# EAGLE board TrackIt_Panel_V01 (EAGLE 9.0.0)
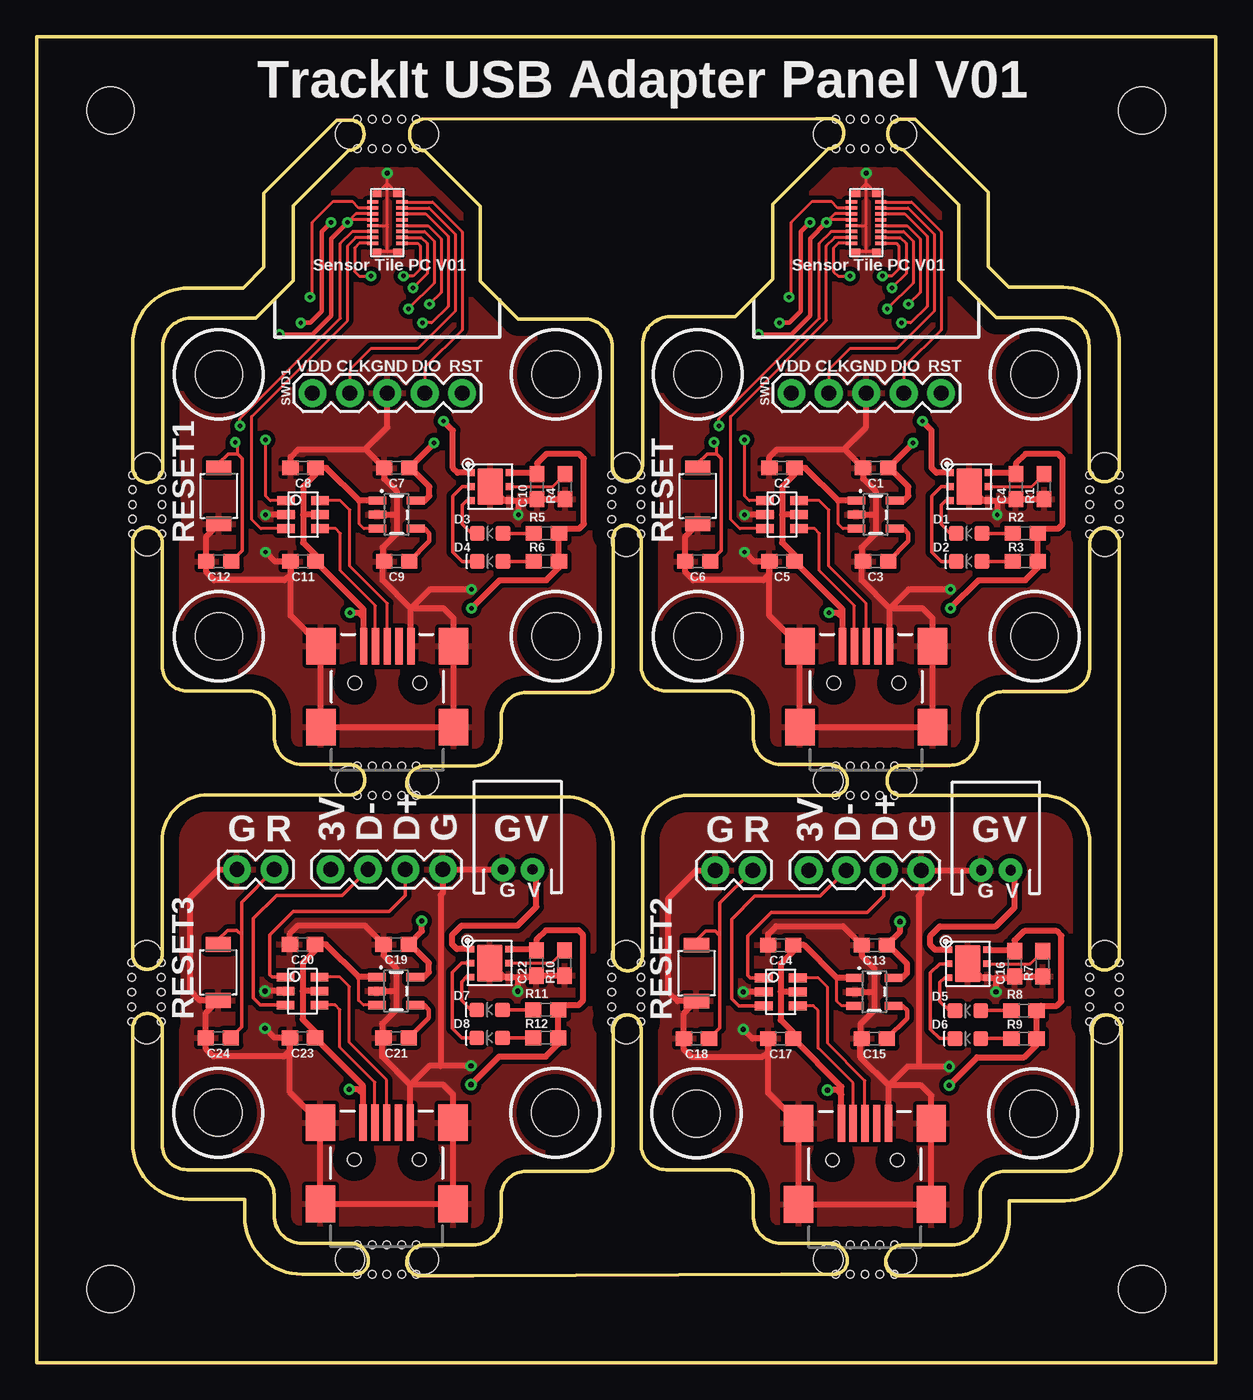
[diagram p0: board, top side]
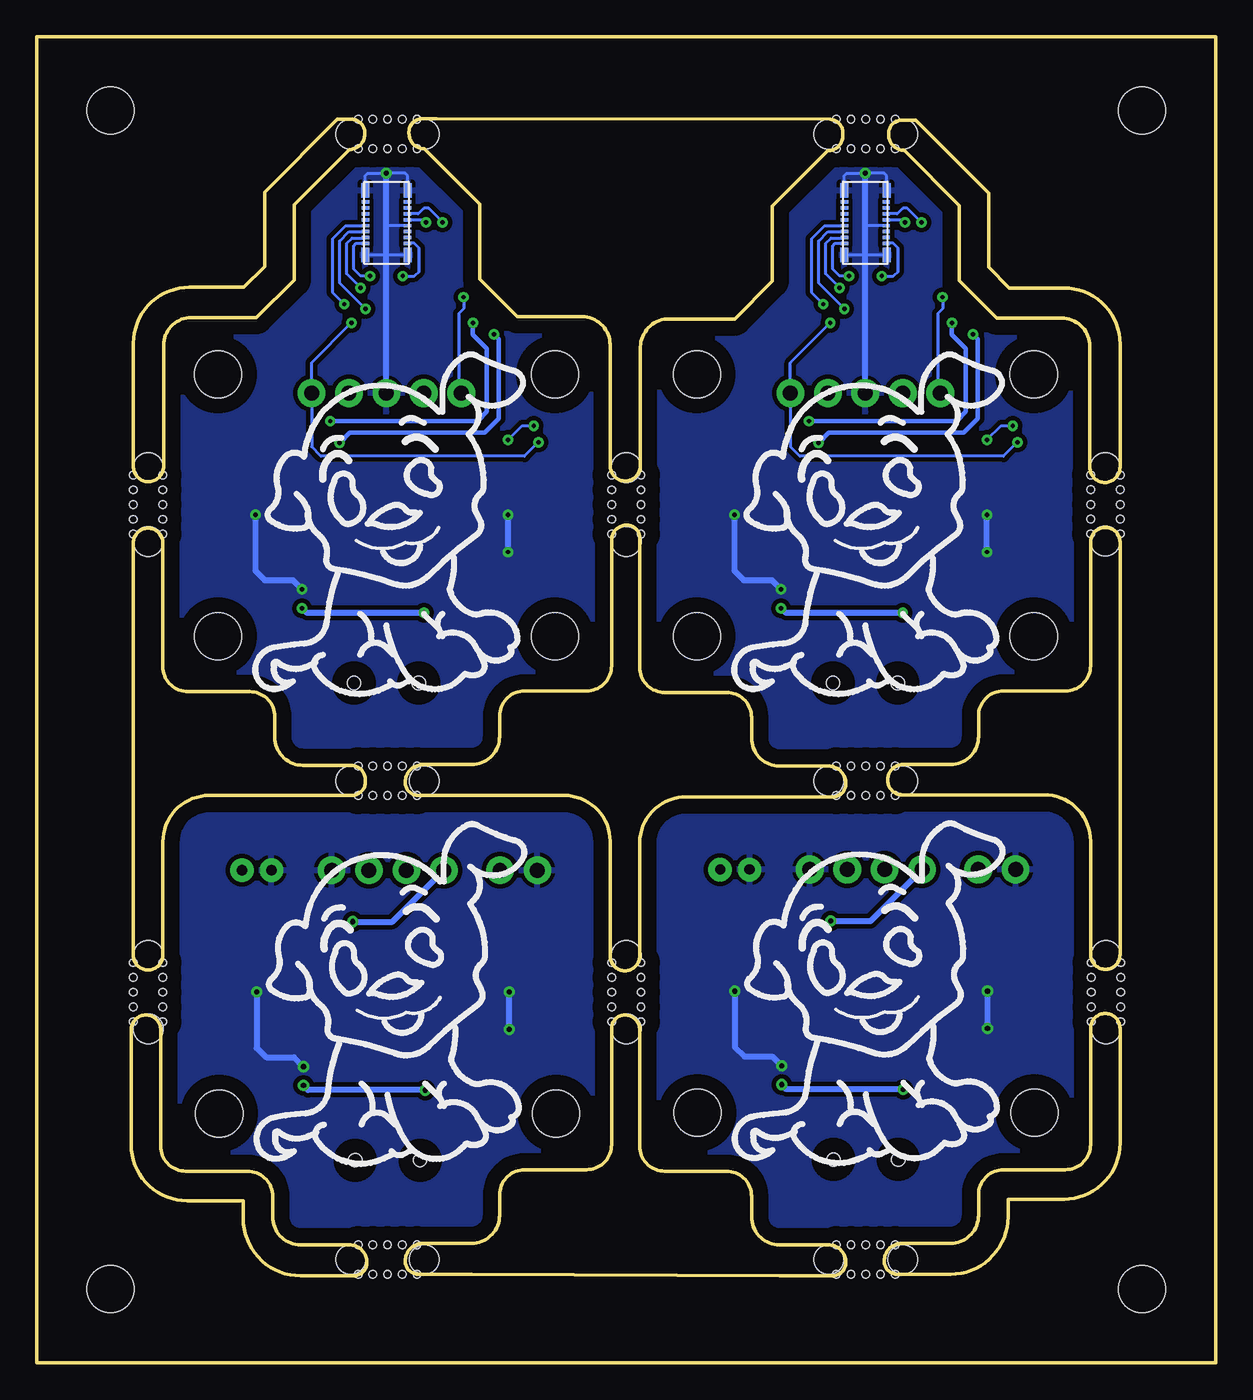
[diagram p1: board, bottom side, seen from below]

Size 80 x 90 mm. Coordinates in mm from the lower left corner, seen from the top.
Outline: 21.25,40.6 18,40.6 arc-90 16.1,42.5 16.1,43.9 arc90 14.4,45.6 10.2,45.6 arc-90 8.5,47.3 8.5,55.7 arc90 7.5,56.7 arc90 6.5,55.7 6.5,27.7 arc90 7.5,26.7 arc90 8.5,27.7 8.5,35.4 arc-90 11.65,38.55 21.3,38.55 arc90 22.25,39.5 22.25,39.6 arc90 21.25,40.6
Outline: 21.25,40.6 21.3,40.6
Outline: 31.5,42.4 31.5,43.8 arc-90 33.2,45.5 37.4,45.5 arc90 39.1,47.2 39.1,55.85 arc-90 39.85,56.85 arc-90 41,55.95 41,47.3 arc90 42.7,45.6 46.9,45.6 arc-90 48.6,43.9 48.6,42.5 arc90 50.5,40.6 53.8,40.6 arc-90 55,39.4 arc-96 54,38.5 44.2,38.5 arc90 41.1,35.4 41.1,27.6 arc-90 40.1,26.6 arc-90 39.1,27.6 39.1,35.3 arc90 35.9,38.4 26.1,38.4
Outline: 31.5,42.4 arc-90 29.6,40.5
Outline: 29.6,40.5 26.3,40.5
Outline: 26.3,40.5 arc90 25.1,39.3
Outline: 25.1,39.3 arc96 26.1,38.4
Outline: 31.5,42.4 arc-90 29.6,40.5
Outline: 26.3,40.5 arc90 25.1,39.3
Outline: 25.1,39.3 arc96 26.1,38.4
Outline: 58.7,40.55 61.95,40.55 arc90 63.85,42.45 63.85,43.85 arc-90 65.55,45.55 69.75,45.55 arc90 71.45,47.25 71.45,55.65 arc-90 72.45,56.65 arc-90 73.45,55.65 73.45,27.65 arc-90 72.45,26.65 arc-90 71.45,27.65 71.45,35.35 arc90 68.3,38.5 58.65,38.5 arc-90 57.7,39.45 57.7,39.55 arc-90 58.7,40.55
Outline: 58.7,40.55 58.65,40.55
Outline: 0,0 80,0 80,90 0,90 0,0
Outline: 6.5,14.9 6.5,22.7 arc-90 7.5,23.7 arc-90 8.5,22.7 8.5,14.8 arc90 10.2,13.1 14.4,13.1 arc-90 16.1,11.4 16.1,10 arc90 18,8.1 21.3,8.1 arc-90 22.5,6.9 arc-96 21.5,6 18,6 arc-90 14.1,9.9 14.1,11.1 10.3,11.1 arc-90 6.5,14.9
Outline: 39.1,22.6 39.1,14.7 arc-90 37.4,13 33.2,13 arc90 31.5,11.3 31.5,9.9 arc-90 29.6,8 26.3,8 arc90 25.1,6.8 arc96 26.1,5.9 29.6,5.9 50.5,6 54,6 arc96 55,6.9 arc90 53.8,8.1 50.5,8.1 arc-90 48.6,10 48.6,11.4 arc90 46.9,13.1 42.7,13.1 arc-90 41,14.8 41,22.7 arc90 40.1,23.6 arc90 39.1,22.6
Outline: 73.6,14.8 73.6,22.6 arc90 72.6,23.6 arc90 71.6,22.6 71.6,14.7 arc-90 69.9,13 65.7,13 arc90 64,11.3 64,9.9 arc-90 62.1,8 58.8,8 arc90 57.6,6.8 arc96 58.6,5.9 62.1,5.9 arc90 66,9.8 66,11 69.8,11 arc90 73.6,14.8
Outline: 6.5,60.8 arc90 7.5,59.75 arc90 8.55,60.8 8.55,69 arc-90 10.45,70.9 14.85,70.9 17.4,73.45 17.4,78.55 21.15,82.3 arc90 22.2,83.35 22.2,83.45 arc90 21.3,84.35 20.35,84.35 15.4,79.4 15.4,74.35 14,72.95 10.3,72.95 arc90 6.5,69.15 6.5,60.8
Outline: 73.45,60.85 arc-90 72.45,59.8 arc-90 71.4,60.85 71.4,69.05 arc90 69.5,70.95 65.1,70.95 62.55,73.5 62.55,78.6 58.8,82.35 arc-90 57.75,83.4 57.75,83.5 arc-90 58.65,84.4 59.6,84.4 64.55,79.45 64.55,74.4 65.95,73 69.65,73 arc-90 73.45,69.2 73.45,60.85
Outline: 39.05,60.9 arc90 40.05,59.85 arc90 41.1,60.9 41.1,69.1 arc-90 43,71 47.4,71 49.95,73.55 49.95,78.65 53.7,82.4 arc90 54.75,83.45 54.75,83.55 arc90 53.85,84.45 52.9,84.45 26.15,84.4 arc90 25.3,83.4 25.3,83.3 arc90 26.35,82.25 30.1,78.5 30.1,73.4 32.65,70.85 37.05,70.85 arc-90 39.05,68.95 39.05,60.9
Copper layers (1*16): Top 0.035mm / dielectric 1.5mm / Bottom 0.035mm
Design rules "default *": minimum track width 6mil, minimum drill 0.35mm, track to track 6mil, track to pad 6mil, pad to pad 6mil, via to via 6mil, smd to smd 6mil, copper to edge 40mil, drill to drill 6mil, minimum pad ring 10mil, minimum via ring 8mil, stop-mask expansion 4mil, vias tented up to drill 20mil, thermal gap 10mil
Holes 0.5 mm at 8.45,23.15 8.45,24.15 8.45,25.15 8.45,26.15 8.45,27.15 6.45,23.15 6.45,24.15 6.45,25.15 6.45,26.15 6.45,27.15 8.49,56.26 8.49,57.26 8.49,58.26 8.49,59.26 8.49,60.26 6.49,56.26 6.49,57.26 6.49,58.26 6.49,59.26 6.49,60.26 21.75,6 22.75,6 23.75,6 24.75,6 25.75,6 21.75,8 22.75,8 23.75,8 24.75,8 25.75,8 54.2,6 55.2,6 56.2,6 57.2,6 58.2,6 54.2,8 55.2,8 56.2,8 57.2,8 58.2,8 54.2,38.5 55.2,38.5 56.2,38.5 57.2,38.5 58.2,38.5 54.2,40.5 55.2,40.5 56.2,40.5 57.2,40.5 58.2,40.5 21.75,38.5 22.75,38.5 23.75,38.5 24.75,38.5 25.75,38.5 21.75,40.5 22.75,40.5 23.75,40.5 24.75,40.5 25.75,40.5 21.75,82.4 22.75,82.4 23.75,82.4 24.75,82.4 25.75,82.4 21.75,84.4 22.75,84.4 23.75,84.4 24.75,84.4 25.75,84.4 54.2,82.4 55.2,82.4 56.2,82.4 57.2,82.4 58.2,82.4 54.2,84.4 55.2,84.4 56.2,84.4 57.2,84.4 58.2,84.4 41,56.25 41,57.25 41,58.25 41,59.25 41,60.25 39,56.25 39,57.25 39,58.25 39,59.25 39,60.25 73.45,23.15 73.45,24.15 73.45,25.15 73.45,26.15 73.45,27.15 71.45,23.15 71.45,24.15 71.45,25.15 71.45,26.15 71.45,27.15 73.45,56.25 73.45,57.25 73.45,58.25 73.45,59.25 73.45,60.25 71.45,56.25 71.45,57.25 71.45,58.25 71.45,59.25 71.45,60.25 41,23.15 41,24.15 41,25.15 41,26.15 41,27.15 39,23.15 39,24.15 39,25.15 39,26.15 39,27.15
Holes 2 mm at 7.45,22.65 7.45,27.65 7.49,55.76 7.49,60.76 21.25,7 26.25,7 53.7,7 58.7,7 53.7,39.5 58.7,39.5 21.25,39.5 26.25,39.5 21.25,83.4 26.25,83.4 53.7,83.4 58.7,83.4 40,55.75 40,60.75 72.45,22.65 72.45,27.65 72.45,55.75 72.45,60.75 40,22.65 40,27.65
Holes 3.2 mm at 5,5 75,5 75,85 5,85 67.71,49.31 44.85,49.31 44.85,67.09 67.71,67.09 35.21,49.31 12.35,49.31 12.35,67.09 35.21,67.09 67.62,16.92 44.76,16.92 35.17,16.97 12.31,16.97

## Footprints (pad centres in the part's own frame; a part is rotated, then mirrored left to right if it is on the bottom)
BM10B(0.8)_BM10NB(0.8)-16DS-0.4V(51) = smd 0.55 x 1: G$1 1.445,3.59; G$2 -1.445,3.59; G$3 1.445,-0.79; G$4 -1.445,-0.79 | smd 0.5 x 0.23: GND$1 1.42,1.2; GPIO2 -1.42,1.2; GPIO3 -1.42,1.6; GPIO5 -1.42,2.4; GPIO6 -1.42,2.8; MIC_CLK 1.42,2.8; NRST -1.42,2; RXD 1.42,0.8; SPI_MISO -1.42,0; SPI_MOSI -1.42,0.4; SPI_NSS -1.42,0.8; SPI_SCK 1.42,0; TXD 1.42,0.4; VDD_1.8V 1.42,2.4; VIN_2-5V 1.42,2; VUSB_3.3V 1.42,1.6
0603 = smd 1.1 x 1: 1 -0.85,0; 2 0.85,0
LED-0603 = smd 1 x 1: A -0.877,0; C 0.877,0
USB-MINIB = smd 2.5 x 0.5: D+ 2.5,0; D- 2.5,0.8; GND 2.5,-1.6; ID 2.5,-0.8; VBUS 2.5,1.6 | smd 2.5 x 2: S1 -3,4.5; S2 2.5,4.5; S3 -3,-4.5; S4 2.5,-4.5 | hole 0.9: 0,2.2; 0,-2.2
1X04 = drill 1.016 pad 1.88: 1 0,0; 2 2.54,0; 3 5.08,0; 4 7.62,0
JST-2-PTH = drill 0.7 pad 1.6: 1 -1,0; 2 1,0
1X02 = drill 1.016 pad 1.88: 1 0,0; 2 2.54,0
SW2-2.6-3.0X2.5X1.2+0.4MM = smd 1 x 1.7: 1 -1.9,0; 2 1.9,0
BM10B(0.8)_BM10B(0.8)-16DP-0.4V(51) = smd 0.6 x 0.44: G$1 0.7,3.37; G$2 -0.7,3.37; G$3 0.7,-0.57; G$4 -0.7,-0.57 | smd 0.75 x 0.23: GND$1 -1,1.2; GPIO2 1,1.2; GPIO3 1,1.6; GPIO5 1,2.4; GPIO6 1,2.8; MIC_CLK -1,2.8; NRST 1,2; RXD -1,0.8; SPI_MISO 1,0; SPI_MOSI 1,0.4; SPI_NSS 1,0.8; SPI_SCK -1,0; TXD -1,0.4; VDD_1.8V -1,2.4; VIN_2-5V -1,2; VUSB_3.3V -1,1.6
1X05 = drill 1.016 pad 1.88: 1 0,0; 2 2.54,0; 3 5.08,0; 4 7.62,0; 5 10.16,0
SOT23-5 = smd 0.55 x 1.2: 3V3&5 -0.95,1.3; BYP$4 0.95,1.3; EN$3 0.95,-1.3; GND$2 0,-1.3; VIN$1 -0.95,-1.3
6-DFN(3X3) = smd 0.45 x 0.5: BAT$1 -0.95,-1.3; CHRG$3 0.95,-1.3; GND$4 0.95,1.3; ON$2 0,-1.3; PROG$5 0,1.3; VCC$6 -0.95,1.3 | smd 2.5 x 1.75: PAD_GND$7 0,0
SOT23-6L = smd 0.6 x 1.2: D+IN$1 -0.95,-1.15; D+OUT$1$6 -0.95,1.15; D-IN$3 0.95,-1.15; D-OUT$1$4 0.95,1.15; GND$2 0,-1.15; VUSB$5 0,1.15

## Placement (x,y rotation side)
ADAPTER_BOARD  BM10B(0.8)_BM10NB(0.8)-16DS-0.4V(51)  [BM10B(0.8)_BM10NB(0.8)-16DS-0.4V(51)]  56.28,75.98 0 bottom
ADAPTER_BOARD1  BM10B(0.8)_BM10NB(0.8)-16DS-0.4V(51)  [BM10B(0.8)_BM10NB(0.8)-16DS-0.4V(51)]  23.78,75.98 0 bottom
C1  1.0uF  [0603]  56.91,60.74 180 top
C2  1.0uF  [0603]  50.56,60.74 180 top
C3  10nF  [0603]  56.91,54.39 180 top
C4  1.0uF  [0603]  66.44,59.47 270 top
C5  0.1uF  [0603]  50.56,54.39 180 top
C6  0.1uF  [0603]  44.85,54.39 180 top
C7  1.0uF  [0603]  24.41,60.74 180 top
C8  1.0uF  [0603]  18.07,60.74 180 top
C9  10nF  [0603]  24.41,54.39 180 top
C10  1.0uF  [0603]  33.94,59.47 270 top
C11  0.1uF  [0603]  18.07,54.39 180 top
C12  0.1uF  [0603]  12.35,54.39 180 top
C13  1.0uF  [0603]  56.83,28.35 180 top
C14  1.0uF  [0603]  50.48,28.35 180 top
C15  10nF  [0603]  56.83,22 180 top
C16  1.0uF  [0603]  66.35,27.08 270 top
C17  0.1uF  [0603]  50.48,22 180 top
C18  0.1uF  [0603]  44.76,22 180 top
C19  1.0uF  [0603]  24.38,28.4 180 top
C20  1.0uF  [0603]  18.03,28.4 180 top
C21  10nF  [0603]  24.38,22.05 180 top
C22  1.0uF  [0603]  33.9,27.13 270 top
C23  0.1uF  [0603]  18.03,22.05 180 top
C24  0.1uF  [0603]  12.31,22.05 180 top
D1  BLUE  [LED-0603]  63.27,56.3 180 top
D2  GREEN  [LED-0603]  63.27,54.39 180 top
D3  BLUE  [LED-0603]  30.77,56.3 180 top
D4  GREEN  [LED-0603]  30.77,54.39 180 top
D5  BLUE  [LED-0603]  63.18,23.9 180 top
D6  GREEN  [LED-0603]  63.18,22 180 top
D7  BLUE  [LED-0603]  30.73,23.95 180 top
D8  GREEN  [LED-0603]  30.73,22.05 180 top
J1  USB_MINI-B_SMT  [USB-MINIB]  56.28,46.13 90 top
J2  USB_MINI-B_SMT  [USB-MINIB]  23.78,46.13 90 top
J3  USB_MINI-B_SMT  [USB-MINIB]  56.19,13.74 90 top
J4  USB  [1X04]  60,33.43 180 top
J5  Bat  [JST-2-PTH]  65.08,33.43 0 top
J6  Reset  [1X02]  46.03,33.43 0 top
J7  USB_MINI-B_SMT  [USB-MINIB]  23.74,13.79 90 top
J8  USB  [1X04]  27.55,33.48 180 top
J9  Bat  [JST-2-PTH]  32.63,33.48 0 top
J10  Reset  [1X02]  13.58,33.48 0 top
R1  47k  [0603]  68.34,59.47 90 top
R2  1k  [0603]  67.08,56.3 0 top
R3  1k  [0603]  67.08,54.39 0 top
R4  47k  [0603]  35.84,59.47 90 top
R5  1k  [0603]  34.58,56.3 0 top
R6  1k  [0603]  34.58,54.39 0 top
R7  47k  [0603]  68.26,27.08 90 top
R8  1k  [0603]  66.99,23.9 0 top
R9  1k  [0603]  66.99,22 0 top
R10  47k  [0603]  35.81,27.13 90 top
R11  1k  [0603]  34.54,23.95 0 top
R12  1k  [0603]  34.54,22.05 0 top
RESET  B3U-3000PM  [SW2-2.6-3.0X2.5X1.2+0.4MM]  44.85,58.84 90 top
RESET1  B3U-3000PM  [SW2-2.6-3.0X2.5X1.2+0.4MM]  12.35,58.84 90 top
RESET2  B3U-3000PM  [SW2-2.6-3.0X2.5X1.2+0.4MM]  44.76,26.44 90 top
RESET3  B3U-3000PM  [SW2-2.6-3.0X2.5X1.2+0.4MM]  12.31,26.49 90 top
SENSOR_TILE  BM10B(0.8)_BM10B(0.8)-16DP-0.4V(51)  [BM10B(0.8)_BM10B(0.8)-16DP-0.4V(51)]  56.28,75.98 0 top
SENSOR_TILE1  BM10B(0.8)_BM10B(0.8)-16DP-0.4V(51)  [BM10B(0.8)_BM10B(0.8)-16DP-0.4V(51)]  23.78,75.98 0 top
SWD  [1X05]  51.2,65.82 0 top
SWD1  [1X05]  18.7,65.82 0 top
U$1  LDK120M33R  [SOT23-5]  24.41,57.56 270 top
U$2  STBC08PMR  [6-DFN(3X3)]  30.77,59.47 270 top
U$3  LDK120M33R  [SOT23-5]  56.91,57.56 270 top
U$4  STBC08PMR  [6-DFN(3X3)]  63.27,59.47 270 top
U$5  USBLC6  [SOT23-6L]  50.56,57.56 270 top
U$6  USBLC6  [SOT23-6L]  18.07,57.56 270 top
U$7  LDK120M33R  [SOT23-5]  56.83,25.17 270 top
U$8  STBC08PMR  [6-DFN(3X3)]  63.18,27.08 270 top
U$9  USBLC6  [SOT23-6L]  50.48,25.17 270 top
U$10  LDK120M33R  [SOT23-5]  24.38,25.22 270 top
U$11  STBC08PMR  [6-DFN(3X3)]  30.73,27.13 270 top
U$12  USBLC6  [SOT23-6L]  18.03,25.22 270 top

## Library data of the parts
ADAPTER_BOARD ADAPTER_BOARD1 SENSOR_TILE SENSOR_TILE1 = BM10B(0.8)
C1 C2 C4 C7 C8 C10 C13 C14 C16 C19 C20 C22 = SparkFun-Capacitors; PROD_ID: CAP-00868
C3 C9 C15 C21 = SparkFun-Capacitors; PROD_ID: CAP-00867
C5 C6 C11 C12 C17 C18 C23 C24 = SparkFun-Capacitors; PROD_ID: CAP-08604
D1 D3 D5 D7 = SparkFun-LED; PROD_ID: DIO-08575
D2 D4 D6 D8 = SparkFun-LED; PROD_ID: DIO-00821
J1-J3 J7 = SparkFun-Connectors; PROD_ID: CONN-08193; SF_ID: PRT-00587
J4 J8 = SparkFun-Connectors; PROD_ID: CONN-09696
J5 J9 = SparkFun-Connectors; PROD_ID: CONN-09863; SKU: PRT-09914
J6 J10 SWD SWD1 = SparkFun-Connectors
R1 R4 R7 R10 = SparkFun-Resistors; PROD_ID: RES-07871
R2 R3 R5 R6 R8 R9 R11 R12 = SparkFun-Resistors; PROD_ID: RES-07856
RESET RESET1-RESET3 = Seeed-Switch-2016; MPN: B3U-1000P-2P-SMD
U$1 U$3 U$7 U$10 = LDK120M33R
U$2 U$4 U$8 U$11 = STBC08PMR
U$5 U$6 U$9 U$12 = USBLC6-2SC6

## Nets
3.3V: ADAPTER_BOARD.VUSB_3.3V C1.1 SENSOR_TILE.VIN_2-5V SENSOR_TILE.VUSB_3.3V U$3.3V3&5
3.3V1: ADAPTER_BOARD1.VUSB_3.3V C7.1 SENSOR_TILE1.VIN_2-5V SENSOR_TILE1.VUSB_3.3V U$1.3V3&5
3.3V2: C13.1 J4.4 U$7.3V3&5
3.3V3: C19.1 J8.4 U$10.3V3&5
GND: ADAPTER_BOARD.G$1 ADAPTER_BOARD.G$2 ADAPTER_BOARD.G$3 ADAPTER_BOARD.G$4 ADAPTER_BOARD.GND$1 C1.2 C2.2 C3.2 C4.2 C5.2 C6.2 J1.GND J1.S1 J1.S2 J1.S3 J1.S4 R1.1 RESET.1 SENSOR_TILE.G$1 SENSOR_TILE.G$2 SENSOR_TILE.G$3 SENSOR_TILE.G$4 SENSOR_TILE.GND$1 SWD.3 U$3.GND$2 U$4.GND$4 U$4.PAD_GND$7 U$5.GND$2
GND1: ADAPTER_BOARD1.G$1 ADAPTER_BOARD1.G$2 ADAPTER_BOARD1.G$3 ADAPTER_BOARD1.G$4 ADAPTER_BOARD1.GND$1 C7.2 C8.2 C9.2 C10.2 C11.2 C12.2 J2.GND J2.S1 J2.S2 J2.S3 J2.S4 R4.1 RESET1.1 SENSOR_TILE1.G$1 SENSOR_TILE1.G$2 SENSOR_TILE1.G$3 SENSOR_TILE1.G$4 SENSOR_TILE1.GND$1 SWD1.3 U$1.GND$2 U$2.GND$4 U$2.PAD_GND$7 U$6.GND$2
GND2: C13.2 C14.2 C15.2 C16.2 C17.2 C18.2 J3.GND J3.S1 J3.S2 J3.S3 J3.S4 J4.1 J5.1 J6.1 R7.1 RESET2.1 U$7.GND$2 U$8.GND$4 U$8.PAD_GND$7 U$9.GND$2
GND3: C19.2 C20.2 C21.2 C22.2 C23.2 C24.2 J7.GND J7.S1 J7.S2 J7.S3 J7.S4 J8.1 J9.1 J10.1 R10.1 RESET3.1 U$10.GND$2 U$11.GND$4 U$11.PAD_GND$7 U$12.GND$2
N$1: R1.2 U$4.PROG$5
N$2: J1.D+ U$5.D+OUT$1$6
N$3: J1.D- U$5.D-OUT$1$4
N$4: D2.C U$4.ON$2
N$5: D1.C U$4.CHRG$3
N$6: C3.1 U$3.BYP$4
N$7: D1.A R2.1
N$8: D2.A R3.1
N$9: ADAPTER_BOARD.GPIO2 SENSOR_TILE.GPIO2
N$10: ADAPTER_BOARD.SPI_NSS SENSOR_TILE.SPI_NSS
N$11: ADAPTER_BOARD.SPI_MOSI SENSOR_TILE.SPI_MOSI
N$12: ADAPTER_BOARD.SPI_MISO SENSOR_TILE.SPI_MISO
N$13: J2.D+ U$6.D+OUT$1$6
N$14: J2.D- U$6.D-OUT$1$4
N$15: C9.1 U$1.BYP$4
N$16: R4.2 U$2.PROG$5
N$17: D4.C U$2.ON$2
N$18: D3.C U$2.CHRG$3
N$19: D3.A R5.1
N$20: D4.A R6.1
N$21: ADAPTER_BOARD1.GPIO2 SENSOR_TILE1.GPIO2
N$22: ADAPTER_BOARD1.SPI_NSS SENSOR_TILE1.SPI_NSS
N$23: ADAPTER_BOARD1.SPI_MOSI SENSOR_TILE1.SPI_MOSI
N$24: ADAPTER_BOARD1.SPI_MISO SENSOR_TILE1.SPI_MISO
N$25: J3.D+ U$9.D+OUT$1$6
N$26: J3.D- U$9.D-OUT$1$4
N$27: C15.1 U$7.BYP$4
N$28: R7.2 U$8.PROG$5
N$29: D6.C U$8.ON$2
N$30: D5.C U$8.CHRG$3
N$31: D5.A R8.1
N$32: D6.A R9.1
N$33: J7.D+ U$12.D+OUT$1$6
N$34: J7.D- U$12.D-OUT$1$4
N$35: C21.1 U$10.BYP$4
N$36: R10.2 U$11.PROG$5
N$37: D8.C U$11.ON$2
N$38: D7.C U$11.CHRG$3
N$39: D7.A R11.1
N$40: D8.A R12.1
RESET: C6.1 RESET.2 SENSOR_TILE.NRST SWD.5
RESET1: C12.1 RESET1.2 SENSOR_TILE1.NRST SWD1.5
RESET2: C18.1 J6.2 RESET2.2
RESET3: C24.1 J10.2 RESET3.2
RX-USB_DP: SENSOR_TILE.RXD U$5.D+IN$1
RX-USB_DP1: SENSOR_TILE1.RXD U$6.D+IN$1
RX-USB_DP2: J4.2 U$9.D+IN$1
RX-USB_DP3: J8.2 U$12.D+IN$1
SPI_SCK: ADAPTER_BOARD.SPI_SCK SENSOR_TILE.SPI_SCK
SPI_SCK1: ADAPTER_BOARD1.SPI_SCK SENSOR_TILE1.SPI_SCK
SWDCLK: SENSOR_TILE.GPIO5 SWD.2
SWDCLK1: SENSOR_TILE1.GPIO5 SWD1.2
SWDIO: SENSOR_TILE.GPIO6 SWD.4
SWDIO1: SENSOR_TILE1.GPIO6 SWD1.4
TX-USB_DM: SENSOR_TILE.TXD U$5.D-IN$3
TX-USB_DM1: SENSOR_TILE1.TXD U$6.D-IN$3
TX-USB_DM2: J4.3 U$9.D-IN$3
TX-USB_DM3: J8.3 U$12.D-IN$3
V_BATT: ADAPTER_BOARD.VIN_2-5V U$4.BAT$1
V_BATT1: ADAPTER_BOARD1.VIN_2-5V U$2.BAT$1
V_BATT2: J5.2 U$8.BAT$1
V_BATT3: J9.2 U$11.BAT$1
V_USB: C2.1 C4.1 C5.1 J1.VBUS R2.2 R3.2 U$3.EN$3 U$3.VIN$1 U$4.VCC$6 U$5.VUSB$5
V_USB1: C8.1 C10.1 C11.1 J2.VBUS R5.2 R6.2 U$1.EN$3 U$1.VIN$1 U$2.VCC$6 U$6.VUSB$5
V_USB2: C14.1 C16.1 C17.1 J3.VBUS R8.2 R9.2 U$7.EN$3 U$7.VIN$1 U$8.VCC$6 U$9.VUSB$5
V_USB3: C20.1 C22.1 C23.1 J7.VBUS R11.2 R12.2 U$10.EN$3 U$10.VIN$1 U$11.VCC$6 U$12.VUSB$5
VDD: SENSOR_TILE.VDD_1.8V SWD.1
VDD1: SENSOR_TILE1.VDD_1.8V SWD1.1

## Tracks (layer width: path | path; a pad name or v marks a point on that pad's centre or on a via)
3.3V  (via drill 0.3)
  Top 0.203: 55.27,77.57 SENSOR_TILE.VUSB_3.3V 53.75,77.58 v53.58,77.41 54.15,77.98 SENSOR_TILE.VIN_2-5V
  Top 0.305: v48.98,69.79 51.2,69.79 52.47,71.06 52.47,76.3 v53.58,77.41
  Top 0.406: U$3.3V3&5 58.82,58.52 59.14,58.84 59.14,59.47 57.87,60.74 C1.1 v59.45,62.43
  Bottom 0.203: v53.58,77.41 53.74,77.57 54.85,77.57 ADAPTER_BOARD.VUSB_3.3V
  Bottom 0.305: v59.45,62.43 58.76,63.12 49.61,63.12 48.66,64.07 48.66,69.47 v48.98,69.79
3.3V1  (via drill 0.3)
  Top 0.203: 22.77,77.57 SENSOR_TILE1.VUSB_3.3V 21.25,77.58 v21.08,77.41 21.65,77.98 SENSOR_TILE1.VIN_2-5V
  Top 0.305: v16.48,69.79 18.7,69.79 19.97,71.06 19.97,76.3 v21.08,77.41
  Top 0.406: U$1.3V3&5 26.32,58.52 26.64,58.84 26.64,59.47 25.37,60.74 C7.1 v26.95,62.43
  Bottom 0.203: v21.08,77.41 21.24,77.57 22.35,77.57 ADAPTER_BOARD1.VUSB_3.3V
  Bottom 0.305: v26.95,62.43 26.26,63.12 17.11,63.12 16.16,64.07 16.16,69.47 v16.48,69.79
3.3V2  (via drill 0.35)
  Top 0.406: U$7.3V3&5 58.73,26.12 59.05,26.44 59.05,27.08 57.78,28.35 C13.1 58.57,29.24 v58.57,29.94
  Bottom 0.406: v58.57,29.94 55.87,29.94 J4.4
3.3V3  (via drill 0.35)
  Top 0.406: U$10.3V3&5 26.28,26.18 26.6,26.49 26.6,27.13 25.33,28.4 C19.1 26.12,29.29 v26.12,29.98
  Bottom 0.406: v26.12,29.98 23.42,29.98 J8.4
GND  (via drill 0.3, 0.35)
  Top 0.203: SENSOR_TILE.GND$1 56.21,77.18 | 56.21,77.18 56.28,77.25 56.28,80.05 | 56.28,80.05 v56.28,80.74 | SENSOR_TILE.G$2 56.28,80.05 | SENSOR_TILE.G$1 56.28,80.05 | SENSOR_TILE.G$3 56.28,75.41 | 56.28,75.41 SENSOR_TILE.G$4 | 56.28,75.41 56.28,77.11 56.21,77.18
  Top 0.406: J1.GND 57.88,51.2 | 57.88,51.2 55.96,53.12 55.96,54.29 55.96,55.34 56.91,56.3 56.91,57.56 | 56.91,57.56 56.91,59.15 56.06,60 C1.2 54.8,62.01 | U$3.GND$2 56.91,57.56 | C2.2 49.72,61.48 50.25,62.01 54.8,62.01 | U$5.GND$2 v48.02,57.56 | RESET.1 44,56.09 C6.2 44,53.65 44.53,53.12 49.3,53.12 49.72,53.54 C5.2 | C5.2 48.66,54.39 v48.02,55.02 | C5.2 49.72,50.7 J1.S2 J1.S1 J1.S3 J1.S4 60.78,50.52 60.1,51.2 57.88,51.2 | U$4.PAD_GND$7 64.22,58.52 U$4.GND$4 65.17,58.52 | 65.17,58.52 66.34,58.52 C4.2 R1.1 | 65.17,58.52 v65.17,57.56 | v61.99,52.48 59.16,52.48 57.88,51.2 | 54.8,62.01 56.28,63.49 SWD.3
  Top 0.508: 55.96,54.29 C3.2
  Bottom 0.203: v56.28,80.74 56.28,80.11 | ADAPTER_BOARD.G$1 54.84,80.57 55.01,80.74 v56.28,80.74 | ADAPTER_BOARD.G$2 57.73,80.57 57.55,80.74 v56.28,80.74 | ADAPTER_BOARD.GND$1 56.21,77.18 | 56.21,77.18 56.28,77.25 v56.28,80.74 | ADAPTER_BOARD.G$3 56.28,75.19 | 56.28,75.19 ADAPTER_BOARD.G$4 | 56.28,75.19 56.28,77.11 56.21,77.18
  Bottom 0.406: v48.02,55.02 v48.02,57.56 | v65.17,57.56 65.17,53.76 64.53,53.12 62.63,53.12 v61.99,52.48 | SWD.3 v56.28,80.74
  pour Bottom (isolate 0.305): 41.04,40.42 71.52,40.42 71.52,81.06 41.04,81.06
  pour Top (isolate 0.305): 41.04,40.42 71.52,40.42 71.52,81.06 41.04,81.06
GND1  (via drill 0.3, 0.35)
  Top 0.203: SENSOR_TILE1.GND$1 23.71,77.18 | 23.71,77.18 23.78,77.25 23.78,80.05 | 23.78,80.05 v23.78,80.74 | SENSOR_TILE1.G$2 23.78,80.05 | SENSOR_TILE1.G$1 23.78,80.05 | SENSOR_TILE1.G$3 23.78,75.41 | 23.78,75.41 SENSOR_TILE1.G$4 | 23.78,75.41 23.78,77.11 23.71,77.18
  Top 0.406: J2.GND 25.38,51.2 | 25.38,51.2 23.46,53.12 23.46,54.29 23.46,55.34 24.41,56.3 24.41,57.56 | 24.41,57.56 24.41,59.15 23.57,60 C7.2 22.3,62.01 | U$1.GND$2 24.41,57.56 | C8.2 17.21,61.48 17.75,62.01 22.3,62.01 | U$6.GND$2 v15.53,57.56 | RESET1.1 11.5,56.09 C12.2 11.5,53.65 12.03,53.12 16.8,53.12 17.21,53.54 C11.2 | C11.2 16.16,54.39 v15.53,55.02 | C11.2 17.21,50.7 J2.S2 J2.S1 J2.S3 J2.S4 28.28,50.52 27.6,51.2 25.38,51.2 | U$2.PAD_GND$7 31.71,58.52 U$2.GND$4 32.67,58.52 | 32.67,58.52 33.84,58.52 C10.2 R4.1 | 32.67,58.52 v32.67,57.56 | v29.5,52.48 26.66,52.48 25.38,51.2 | 22.3,62.01 23.78,63.49 SWD1.3
  Top 0.508: 23.46,54.29 C9.2
  Bottom 0.203: v23.78,80.74 23.78,80.11 | ADAPTER_BOARD1.G$1 22.34,80.57 22.51,80.74 v23.78,80.74 | ADAPTER_BOARD1.G$2 25.23,80.57 25.05,80.74 v23.78,80.74 | ADAPTER_BOARD1.GND$1 23.71,77.18 | 23.71,77.18 23.78,77.25 v23.78,80.74 | ADAPTER_BOARD1.G$3 23.78,75.19 | 23.78,75.19 ADAPTER_BOARD1.G$4 | 23.78,75.19 23.78,77.11 23.71,77.18
  Bottom 0.406: v15.53,55.02 v15.53,57.56 | v32.67,57.56 32.67,53.76 32.03,53.12 30.13,53.12 v29.5,52.48 | SWD1.3 v23.78,80.74
  pour Bottom (isolate 0.305): 8.54,40.42 39.02,40.42 39.02,81.06 8.54,81.06
  pour Top (isolate 0.305): 8.54,40.42 39.02,40.42 39.02,81.06 8.54,81.06
GND2  (via drill 0.35)
  Top 0.406: J3.GND 57.79,18.81 | 57.79,18.81 55.87,20.73 55.87,21.89 55.87,22.95 56.83,23.9 56.83,25.17 | 56.83,25.17 56.83,26.76 55.98,27.61 C13.2 54.71,29.62 50.16,29.62 49.63,29.09 C14.2 | U$7.GND$2 56.83,25.17 | U$9.GND$2 v47.94,25.17 | C17.2 48.57,22 v47.94,22.63 | C17.2 49.63,21.15 49.21,20.73 44.44,20.73 43.91,21.26 C18.2 43.91,23.69 RESET2.1 43.49,24.54 42.86,25.17 42.86,31.52 44.76,33.43 J6.1 | C17.2 49.63,18.31 J3.S2 J3.S1 J3.S3 J3.S4 60.69,18.13 60.01,18.81 57.79,18.81 | U$8.PAD_GND$7 64.13,26.13 U$8.GND$4 65.08,26.13 | 65.08,26.13 66.25,26.13 C16.2 R7.1 | 65.08,26.13 v65.08,25.17 | v61.91,20.09 59.84,20.09 | 59.84,20.09 59.08,20.09 57.79,18.81 | J5.1 J4.1 60,31.84 59.84,31.68 59.84,20.09
  Top 0.508: 55.87,21.89 C15.2
  Bottom 0.406: v47.94,22.63 v47.94,25.17 | v65.08,25.17 65.08,21.36 64.45,20.73 62.54,20.73 v61.91,20.09
  pour Bottom (isolate 0.305): 40.95,8.03 71.43,8.03 71.43,38.51 40.95,38.51
  pour Top (isolate 0.305): 40.95,8.03 71.43,8.03 71.43,38.51 40.95,38.51
GND3  (via drill 0.35)
  Top 0.406: J7.GND 25.34,18.86 | 25.34,18.86 23.42,20.78 23.42,21.95 23.42,23 24.38,23.95 24.38,25.22 | 24.38,25.22 24.38,26.81 23.53,27.66 C19.2 22.26,29.67 17.71,29.67 17.18,29.14 C20.2 | U$10.GND$2 24.38,25.22 | U$12.GND$2 v15.49,25.22 | C23.2 16.12,22.05 v15.49,22.68 | C23.2 17.18,21.2 16.76,20.78 11.99,20.78 11.46,21.31 C24.2 11.46,23.74 RESET3.1 11.04,24.59 10.41,25.22 10.41,31.57 12.31,33.48 J10.1 | C23.2 17.18,18.36 J7.S2 J7.S1 J7.S3 J7.S4 28.24,18.18 27.56,18.86 25.34,18.86 | U$11.PAD_GND$7 31.68,26.18 U$11.GND$4 32.63,26.18 | 32.63,26.18 33.8,26.18 C22.2 R10.1 | 32.63,26.18 v32.63,25.22 | v29.46,20.14 27.39,20.14 | 27.39,20.14 26.62,20.14 25.34,18.86 | J9.1 J8.1 27.55,31.89 27.39,31.73 27.39,20.14
  Top 0.508: 23.42,21.95 C21.2
  Bottom 0.406: v15.49,22.68 v15.49,25.22 | v32.63,25.22 32.63,21.41 32,20.78 30.09,20.78 v29.46,20.14
  pour Bottom (isolate 0.305): 8.5,8.08 38.98,8.08 38.98,38.56 8.5,38.56
  pour Top (isolate 0.305): 8.5,8.08 38.98,8.08 38.98,38.56 8.5,38.56
N$1
  Top 0.203: U$4.PROG$5 67.5,59.47 R1.2
N$2
  Top 0.203: J1.D+ 56.28,51.53 53.74,54.07 53.74,57.88 53.1,58.52 U$5.D+OUT$1$6
N$3
  Top 0.203: J1.D- 55.48,51.38 53.1,53.76 53.1,56.3 52.78,56.62 U$5.D-OUT$1$4
N$4
  Top 0.254: D2.C 61.36,54.39 60.73,55.02 60.73,58.84 61.36,59.47 U$4.ON$2
N$5
  Top 0.254: U$4.CHRG$3 61.68,58.52 61.36,58.2 61.36,56.93 61.99,56.3 D1.C
N$6
  Top 0.305: C3.1 59.14,55.76 59.14,56.3 58.82,56.62 U$3.BYP$4
N$7
  Top 0.254: R2.1 D1.A
N$8
  Top 0.254: D2.A R3.1
N$9  (via drill 0.3)
  Top 0.203: SENSOR_TILE.GPIO2 59.05,77.18 59.93,76.3 59.93,72.65 v59.14,71.85
  Bottom 0.203: v59.14,71.85 59.93,72.65 59.93,76.3 59.05,77.18 ADAPTER_BOARD.GPIO2
N$10  (via drill 0.3)
  Top 0.203: SENSOR_TILE.SPI_NSS 58.81,76.78 59.45,76.14 59.45,73.28 v57.71,71.53
  Bottom 0.203: v57.71,71.53 59.45,73.28 59.45,76.14 58.82,76.77 ADAPTER_BOARD.SPI_NSS
N$11  (via drill 0.3)
  Top 0.203: SENSOR_TILE.SPI_MOSI 58.58,76.38 58.98,75.98 58.98,73.92 v58.03,72.96
  Bottom 0.203: v58.03,72.96 58.98,73.92 58.98,75.98 58.61,76.35 57.73,76.35 ADAPTER_BOARD.SPI_MOSI
N$12  (via drill 0.3)
  Top 0.203: SENSOR_TILE.SPI_MISO 58.34,75.98 58.5,75.82 58.5,74.23 58.03,73.76 v57.39,73.76
  Bottom 0.203: v57.39,73.76 58.03,73.76 58.5,74.23 58.5,75.82 58.34,75.98 ADAPTER_BOARD.SPI_MISO
N$13
  Top 0.203: J2.D+ 23.78,51.53 21.24,54.07 21.24,57.88 20.61,58.52 20.6,58.52 U$6.D+OUT$1$6
N$14
  Top 0.203: J2.D- 22.98,51.38 20.61,53.76 20.61,56.3 20.29,56.62 U$6.D-OUT$1$4
N$15
  Top 0.305: C9.1 26.64,55.76 26.64,56.3 26.32,56.62 U$1.BYP$4
N$16
  Top 0.203: U$2.PROG$5 34.99,59.47 R4.2
N$17
  Top 0.254: D4.C 28.86,54.39 28.23,55.02 28.23,58.84 28.86,59.47 U$2.ON$2
N$18
  Top 0.254: U$2.CHRG$3 29.18,58.52 28.86,58.2 28.86,56.93 29.5,56.3 D3.C
N$19
  Top 0.254: R5.1 D3.A
N$20
  Top 0.254: D4.A R6.1
N$21  (via drill 0.3)
  Top 0.203: SENSOR_TILE1.GPIO2 26.55,77.18 27.43,76.3 27.43,72.65 v26.64,71.85
  Bottom 0.203: v26.64,71.85 27.43,72.65 27.43,76.3 26.55,77.18 ADAPTER_BOARD1.GPIO2
N$22  (via drill 0.3)
  Top 0.203: SENSOR_TILE1.SPI_NSS 26.31,76.78 26.95,76.14 26.95,73.28 v25.21,71.53
  Bottom 0.203: v25.21,71.53 26.95,73.28 26.95,76.14 26.32,76.77 ADAPTER_BOARD1.SPI_NSS
N$23  (via drill 0.3)
  Top 0.203: SENSOR_TILE1.SPI_MOSI 26.08,76.38 26.48,75.98 26.48,73.92 v25.53,72.96
  Bottom 0.203: v25.53,72.96 26.48,73.92 26.48,75.98 26.11,76.35 25.23,76.35 ADAPTER_BOARD1.SPI_MOSI
N$24  (via drill 0.3)
  Top 0.203: SENSOR_TILE1.SPI_MISO 25.84,75.98 26,75.82 26,74.23 25.53,73.76 v24.89,73.76
  Bottom 0.203: v24.89,73.76 25.53,73.76 26,74.23 26,75.82 25.84,75.98 ADAPTER_BOARD1.SPI_MISO
N$25
  Top 0.203: J3.D+ 56.19,19.14 53.65,21.68 53.65,25.49 53.02,26.12 53.01,26.12 U$9.D+OUT$1$6
N$26
  Top 0.203: J3.D- 55.39,18.99 53.02,21.36 53.02,23.9 52.7,24.22 U$9.D-OUT$1$4
N$27
  Top 0.305: C15.1 59.05,23.37 59.05,23.9 58.73,24.22 U$7.BYP$4
N$28
  Top 0.203: U$8.PROG$5 67.41,27.08 R7.2
N$29
  Top 0.254: D6.C 61.27,22 60.64,22.63 60.64,26.44 61.27,27.08 U$8.ON$2
N$30
  Top 0.254: U$8.CHRG$3 61.59,26.13 61.27,25.81 61.27,24.54 61.91,23.9 D5.C
N$31
  Top 0.254: R8.1 D5.A
N$32
  Top 0.254: D6.A R9.1
N$33
  Top 0.203: J7.D+ 23.74,19.19 21.2,21.73 21.2,25.54 20.57,26.18 20.56,26.17 U$12.D+OUT$1$6
N$34
  Top 0.203: J7.D- 22.94,19.04 20.57,21.41 20.57,23.95 20.25,24.27 U$12.D-OUT$1$4
N$35
  Top 0.305: C21.1 26.6,23.42 26.6,23.95 26.28,24.27 U$10.BYP$4
N$36
  Top 0.203: U$11.PROG$5 34.96,27.13 R10.2
N$37
  Top 0.254: D8.C 28.82,22.05 28.19,22.68 28.19,26.49 28.82,27.13 U$11.ON$2
N$38
  Top 0.254: U$11.CHRG$3 29.14,26.18 28.82,25.86 28.82,24.59 29.46,23.95 D7.C
N$39
  Top 0.254: R11.1 D7.A
N$40
  Top 0.254: D8.A R12.1
RESET  (via drill 0.3)
  Top 0.203: SENSOR_TILE.NRST 58.88,77.98 60.41,76.46 60.41,71.69 59.3,70.58 v58.66,70.58 | 46.12,61.69 46.12,62.33 v45.96,62.49
  Top 0.254: C6.1 46.44,55.13 46.44,61.38 46.12,61.69 45.48,61.69 44.85,61.06 RESET.2
  Bottom 0.203: v58.66,70.58 61.36,67.88 SWD.5 61.36,62.17 60.73,61.53 46.91,61.53 v45.96,62.49
RESET1  (via drill 0.3)
  Top 0.203: SENSOR_TILE1.NRST 26.38,77.98 27.91,76.46 27.91,71.69 26.8,70.58 v26.16,70.58 | 13.62,61.69 13.62,62.33 v13.46,62.49
  Top 0.254: C12.1 13.94,55.13 13.94,61.38 13.62,61.69 12.98,61.69 12.35,61.06 RESET1.2
  Bottom 0.203: v26.16,70.58 28.86,67.88 SWD1.5 28.86,62.17 28.23,61.53 14.41,61.53 v13.46,62.49
RESET2
  Top 0.254: C18.1 46.35,22.73 46.35,28.98 | 46.35,28.98 46.03,29.3 45.4,29.3 44.76,28.67 RESET2.2 | 46.35,28.98 46.35,31.21 J6.2
RESET3
  Top 0.254: C24.1 13.9,22.79 13.9,29.03 | 13.9,29.03 13.58,29.35 12.95,29.35 12.31,28.71 RESET3.2 | 13.9,29.03 13.9,31.26 J10.2
RX-USB_DP  (via drill 0.3)
  Top 0.203: U$5.D+IN$1 48.34,58.52 48.02,58.84 v48.02,62.65 | SENSOR_TILE.RXD 53.91,76.78 53.1,75.98 53.1,70.9 46.28,64.07 v46.28,63.6
  Bottom 0.203: v48.02,62.65 47.07,63.6 v46.28,63.6
RX-USB_DP1  (via drill 0.3)
  Top 0.203: U$6.D+IN$1 15.85,58.52 15.53,58.84 v15.53,62.65 | SENSOR_TILE1.RXD 21.41,76.78 20.61,75.98 20.61,70.9 13.78,64.07 v13.78,63.6
  Bottom 0.203: v15.53,62.65 14.57,63.6 v13.78,63.6
RX-USB_DP2
  Top 0.254: U$9.D+IN$1 48.42,26.12 48.26,26.28 48.26,28.98 49.84,30.57 56.35,30.57 57.46,31.68 J4.2
RX-USB_DP3
  Top 0.254: U$12.D+IN$1 15.97,26.17 15.8,26.33 15.8,29.03 17.39,30.62 23.9,30.62 25.01,31.73 J8.2
SPI_SCK  (via drill 0.3)
  Top 0.203: SENSOR_TILE.SPI_SCK 54.38,75.98 54.06,75.66 54.06,74.08 54.38,73.76 v55.17,73.76
  Bottom 0.203: v55.17,73.76 54.38,73.76 54.06,74.08 54.06,75.66 54.38,75.98 ADAPTER_BOARD.SPI_SCK
SPI_SCK1  (via drill 0.3)
  Top 0.203: SENSOR_TILE1.SPI_SCK 21.88,75.98 21.56,75.66 21.56,74.08 21.88,73.76 v22.67,73.76
  Bottom 0.203: v22.67,73.76 21.88,73.76 21.56,74.08 21.56,75.66 21.88,75.98 ADAPTER_BOARD1.SPI_SCK
SWDCLK
  Top 0.203: SENSOR_TILE.GPIO5 59.12,78.38 60.88,76.61 60.88,71.38 58.34,68.84 55.17,68.84 53.74,67.41 SWD.2
SWDCLK1
  Top 0.203: SENSOR_TILE1.GPIO5 26.62,78.38 28.38,76.61 28.38,71.38 25.84,68.84 22.67,68.84 21.24,67.41 SWD1.2
SWDIO
  Top 0.203: SENSOR_TILE.GPIO6 59.35,78.78 61.36,76.77 61.36,70.11 58.82,67.57 SWD.4
SWDIO1
  Top 0.203: SENSOR_TILE1.GPIO6 26.85,78.78 28.86,76.77 28.86,70.11 26.32,67.57 SWD1.4
TX-USB_DM
  Top 0.203: U$5.D-IN$3 47.7,56.62 47.07,57.25 47.07,64.23 53.58,70.74 53.58,75.82 54.14,76.38 SENSOR_TILE.TXD
TX-USB_DM1
  Top 0.203: U$6.D-IN$3 15.21,56.62 14.57,57.25 14.57,64.23 21.08,70.74 21.08,75.82 21.64,76.38 SENSOR_TILE1.TXD
TX-USB_DM2
  Top 0.254: U$9.D-IN$3 47.62,24.22 47.14,24.7 47.14,30.09 48.73,31.68 53.18,31.68 J4.3
TX-USB_DM3
  Top 0.254: U$12.D-IN$3 15.17,24.27 14.69,24.75 14.69,30.14 16.28,31.73 20.73,31.73 J8.3
V_BATT  (via drill 0.3)
  Top 0.305: v52.47,77.41 51.84,76.77 51.84,71.38 51.04,70.58 v50.41,70.58
  Top 0.406: U$4.BAT$1 61.05,60.42 60.73,60.74 60.73,63.28 v60.09,63.91
  Bottom 0.203: 52.63,77.41 v52.47,77.41 53.42,78.36 53.74,78.36 54.12,77.98 ADAPTER_BOARD.VIN_2-5V
  Bottom 0.305: v60.09,63.91 50.09,63.91 49.45,64.55 49.45,68.84 50.41,69.79 v50.41,70.58
V_BATT1  (via drill 0.3)
  Top 0.305: v19.97,77.41 19.34,76.77 19.34,71.38 18.54,70.58 v17.91,70.58
  Top 0.406: U$2.BAT$1 28.55,60.42 28.23,60.74 28.23,63.28 v27.59,63.91
  Bottom 0.203: 20.13,77.41 v19.97,77.41 20.92,78.36 21.24,78.36 21.62,77.98 ADAPTER_BOARD1.VIN_2-5V
  Bottom 0.305: v27.59,63.91 17.59,63.91 16.95,64.55 16.95,68.84 17.91,69.79 v17.91,70.58
V_BATT2
  Top 0.406: U$8.BAT$1 60.96,28.03 60.64,28.35 60.64,28.98 61.27,29.62 65.08,29.62 66.35,30.89 66.35,33.16 J5.2
V_BATT3
  Top 0.406: U$11.BAT$1 28.51,28.08 28.19,28.4 28.19,29.03 28.82,29.67 32.63,29.67 33.9,30.94 33.9,33.21 J9.2
V_USB  (via drill 0.3)
  Top 0.203: U$3.EN$3 54.69,56.62 54.38,56.93 54.38,58.52
  Top 0.254: R2.2 68.24,56.61
  Top 0.406: J1.VBUS 54.68,50.58 | 54.68,50.58 54.68,51.12 C5.1 51.41,54.81 50.56,55.66 50.56,57.56 | 50.56,57.56 50.56,59.47 51.41,60.32 C2.1 52.15,60.74 54.38,58.52 U$3.VIN$1 | U$5.VUSB$5 50.56,57.56 | U$4.VCC$6 66.34,60.42 C4.1 66.44,61.06 67.08,61.69 69.3,61.69 69.61,61.38 69.61,56.93 69.3,56.61 68.24,56.61 | R2.2 R3.2 67.92,53.97 67.08,53.12 63.9,53.12 v61.99,51.22 | 54.68,50.58 54.36,50.9 v53.74,50.9
  Bottom 0.406: v53.74,50.9 61.68,50.9 v61.99,51.22
V_USB1  (via drill 0.3)
  Top 0.203: U$1.EN$3 22.19,56.62 21.88,56.93 21.88,58.52
  Top 0.254: R5.2 35.74,56.61
  Top 0.406: J2.VBUS 22.18,50.58 | 22.18,50.58 22.18,51.12 C11.1 18.91,54.81 18.07,55.66 18.07,57.56 | 18.07,57.56 18.07,59.47 18.91,60.32 C8.1 19.65,60.74 21.88,58.52 U$1.VIN$1 | U$6.VUSB$5 18.07,57.56 | U$2.VCC$6 33.84,60.42 C10.1 33.94,61.06 34.58,61.69 36.8,61.69 37.12,61.38 37.12,56.93 36.8,56.61 35.74,56.61 | R5.2 R6.2 35.42,53.97 34.58,53.12 31.4,53.12 v29.5,51.22 | 22.18,50.58 21.86,50.9 v21.24,50.9
  Bottom 0.406: v21.24,50.9 29.18,50.9 v29.5,51.22
V_USB2  (via drill 0.35)
  Top 0.203: U$7.EN$3 54.6,24.22 54.29,24.54 54.29,26.12
  Top 0.254: R8.2 68.15,24.22
  Top 0.406: J3.VBUS 54.59,18.19 | 54.59,18.19 54.59,18.73 C17.1 51.33,22.42 50.48,23.27 50.48,25.17 | 50.48,25.17 50.48,27.08 51.33,27.93 C14.1 52.06,28.35 54.29,26.12 U$7.VIN$1 | U$9.VUSB$5 50.48,25.17 | U$8.VCC$6 66.25,28.03 C16.1 66.35,28.67 66.99,29.3 69.21,29.3 69.53,28.98 69.53,24.54 69.21,24.22 68.15,24.22 | R8.2 R9.2 67.84,21.58 66.99,20.73 63.81,20.73 v61.91,18.82 | 54.59,18.19 54.27,18.51 v53.65,18.51
  Bottom 0.406: v53.65,18.51 61.59,18.51 v61.91,18.82
V_USB3  (via drill 0.35)
  Top 0.203: U$10.EN$3 22.15,24.27 21.84,24.59 21.84,26.18
  Top 0.254: R11.2 35.7,24.27
  Top 0.406: J7.VBUS 22.14,18.24 | 22.14,18.24 22.14,18.78 C23.1 18.88,22.47 18.03,23.32 18.03,25.22 | 18.03,25.22 18.03,27.13 18.88,27.98 C20.1 19.61,28.4 21.84,26.18 U$10.VIN$1 | U$12.VUSB$5 18.03,25.22 | U$11.VCC$6 33.8,28.08 C22.1 33.9,28.71 34.54,29.35 36.76,29.35 37.08,29.03 37.08,24.59 36.76,24.27 35.7,24.27 | R11.2 R12.2 35.39,21.63 34.54,20.78 31.36,20.78 v29.46,18.87 | 22.14,18.24 21.82,18.55 v21.2,18.55
  Bottom 0.406: v21.2,18.55 29.14,18.55 v29.46,18.87
VDD  (via drill 0.3)
  Top 0.203: SENSOR_TILE.VDD_1.8V 54.36,78.38 53.9,78.84 52.63,78.84 51.2,77.41 51.2,72.49 v51.04,72.33
  Bottom 0.203: v51.04,72.33 51.04,71.53 51.36,71.22 51.36,65.98 SWD.1
VDD1  (via drill 0.3)
  Top 0.203: SENSOR_TILE1.VDD_1.8V 21.86,78.38 21.4,78.84 20.13,78.84 18.7,77.41 18.7,72.49 v18.54,72.33
  Bottom 0.203: v18.54,72.33 18.54,71.53 18.86,71.22 18.86,65.98 SWD1.1

## Text on the board
tPlace: TrackIt USB Adapter Panel V01 | Sensor Tile PC V01 | Sensor Tile PC V01 | VDD | CLK | GND | DIO | RST | VDD | CLK | GND | DIO | RST | G | R | 3V | D- | D+ | G | G | V | G | R | 3V | D- | D+ | G | G | V | G | V | G | V
200bmp: C:/WorkSpace/Eagle_WorkSpace/TrackIt/SensorTile_Adapter/PC_USB_V01/Doggy.bmp | C:/WorkSpace/Eagle_WorkSpace/TrackIt/SensorTile_Adapter/PC_USB_V01/Doggy.bmp